# Altium PCB digital_power.PcbDoc (part 1 of 2)
Units mil, origin at the board's own origin, x right, y up, seen from the top; angles counter-clockwise.
Board outline 2700 x 2100 mil, 4 copper layers (L1, L2, L3, L4), stack 13.956 mil thick; 99 components, 71 nets, 287 pads, 79 vias.
Unrouted connection lines stored in the file: 196.
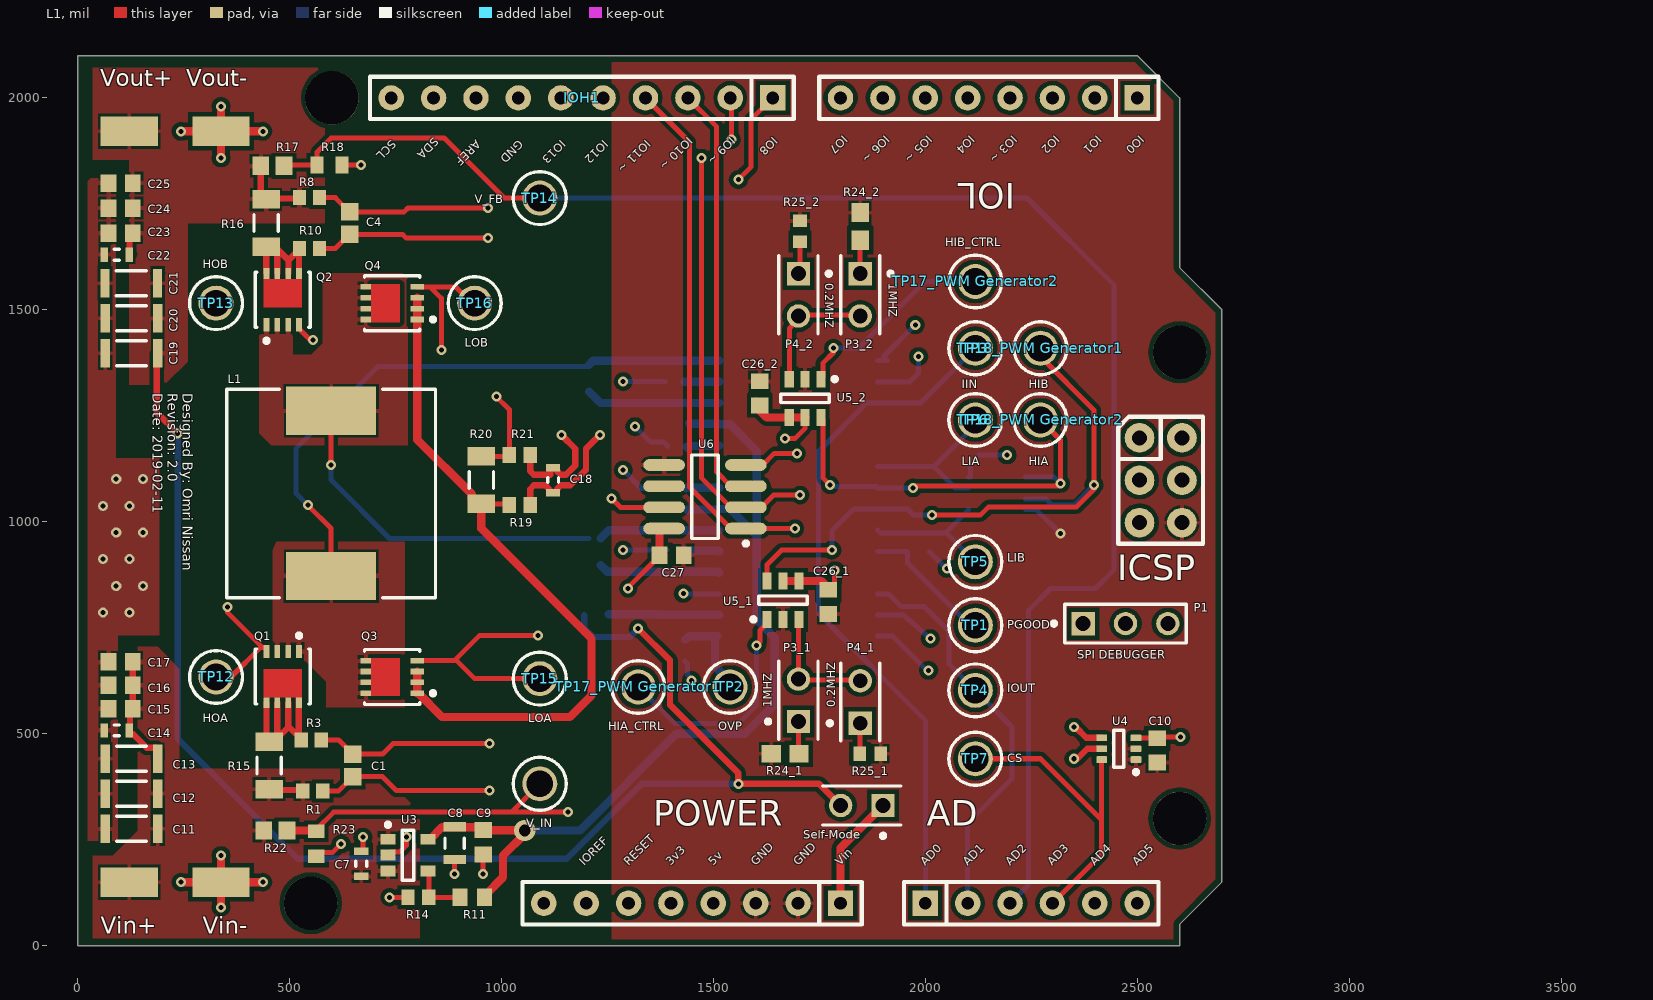
[diagram p0: L1 view]
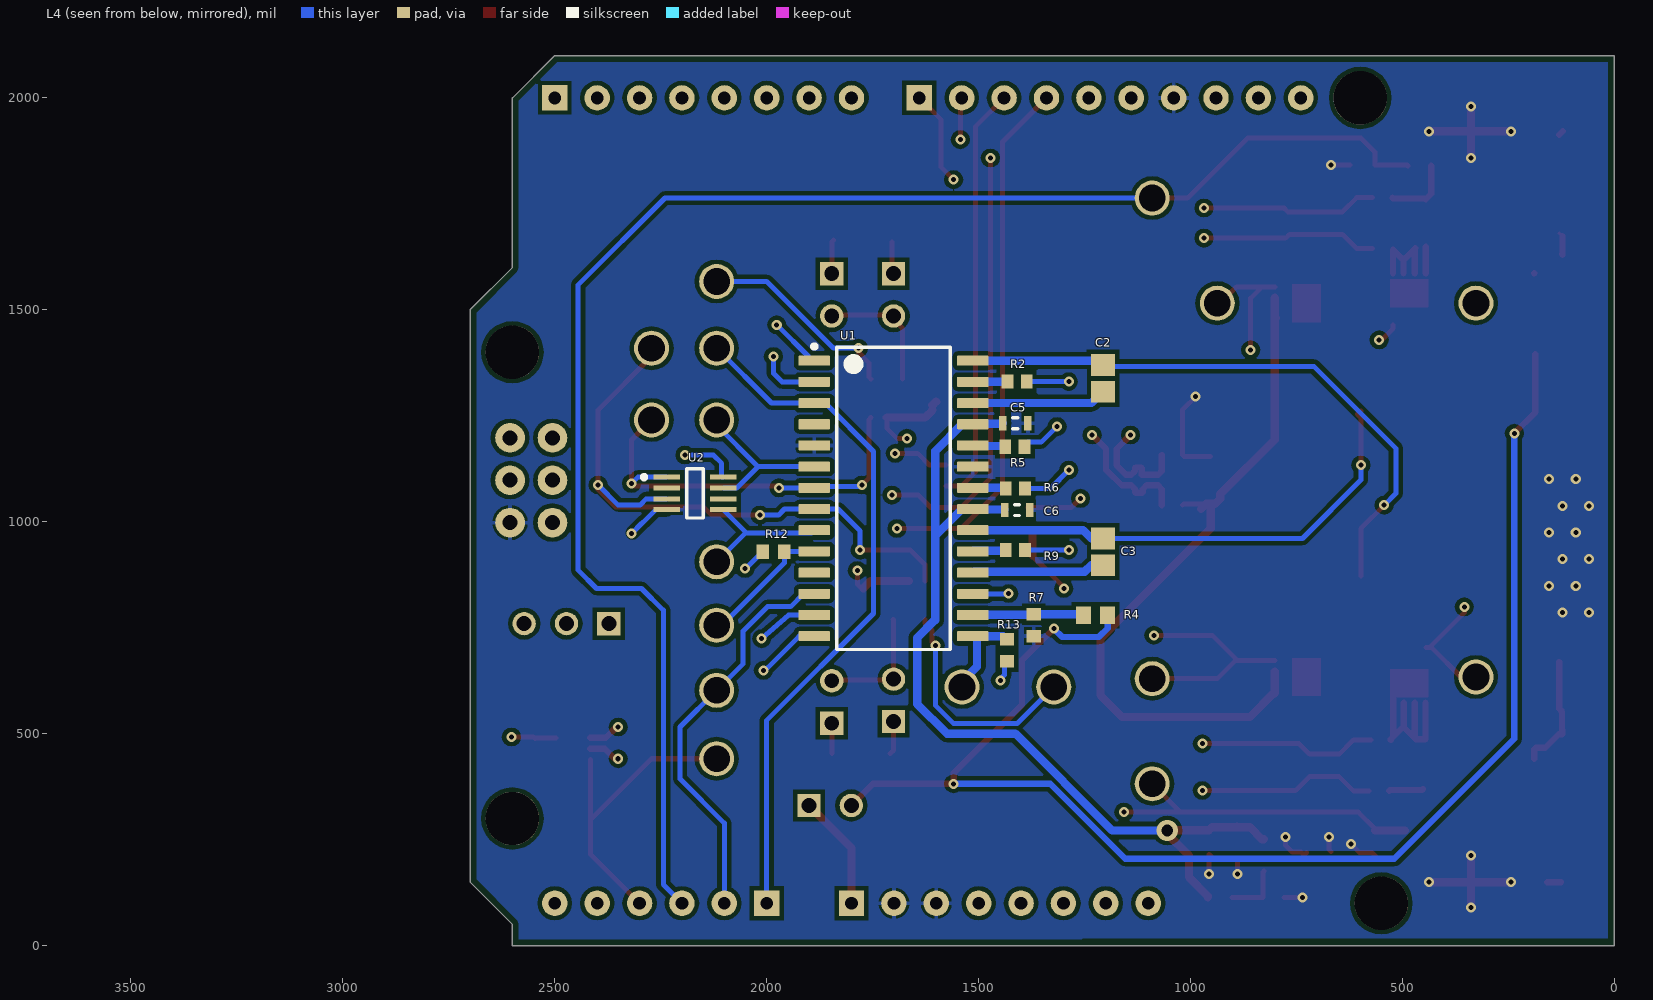
[diagram p1: L4 view, seen from below]
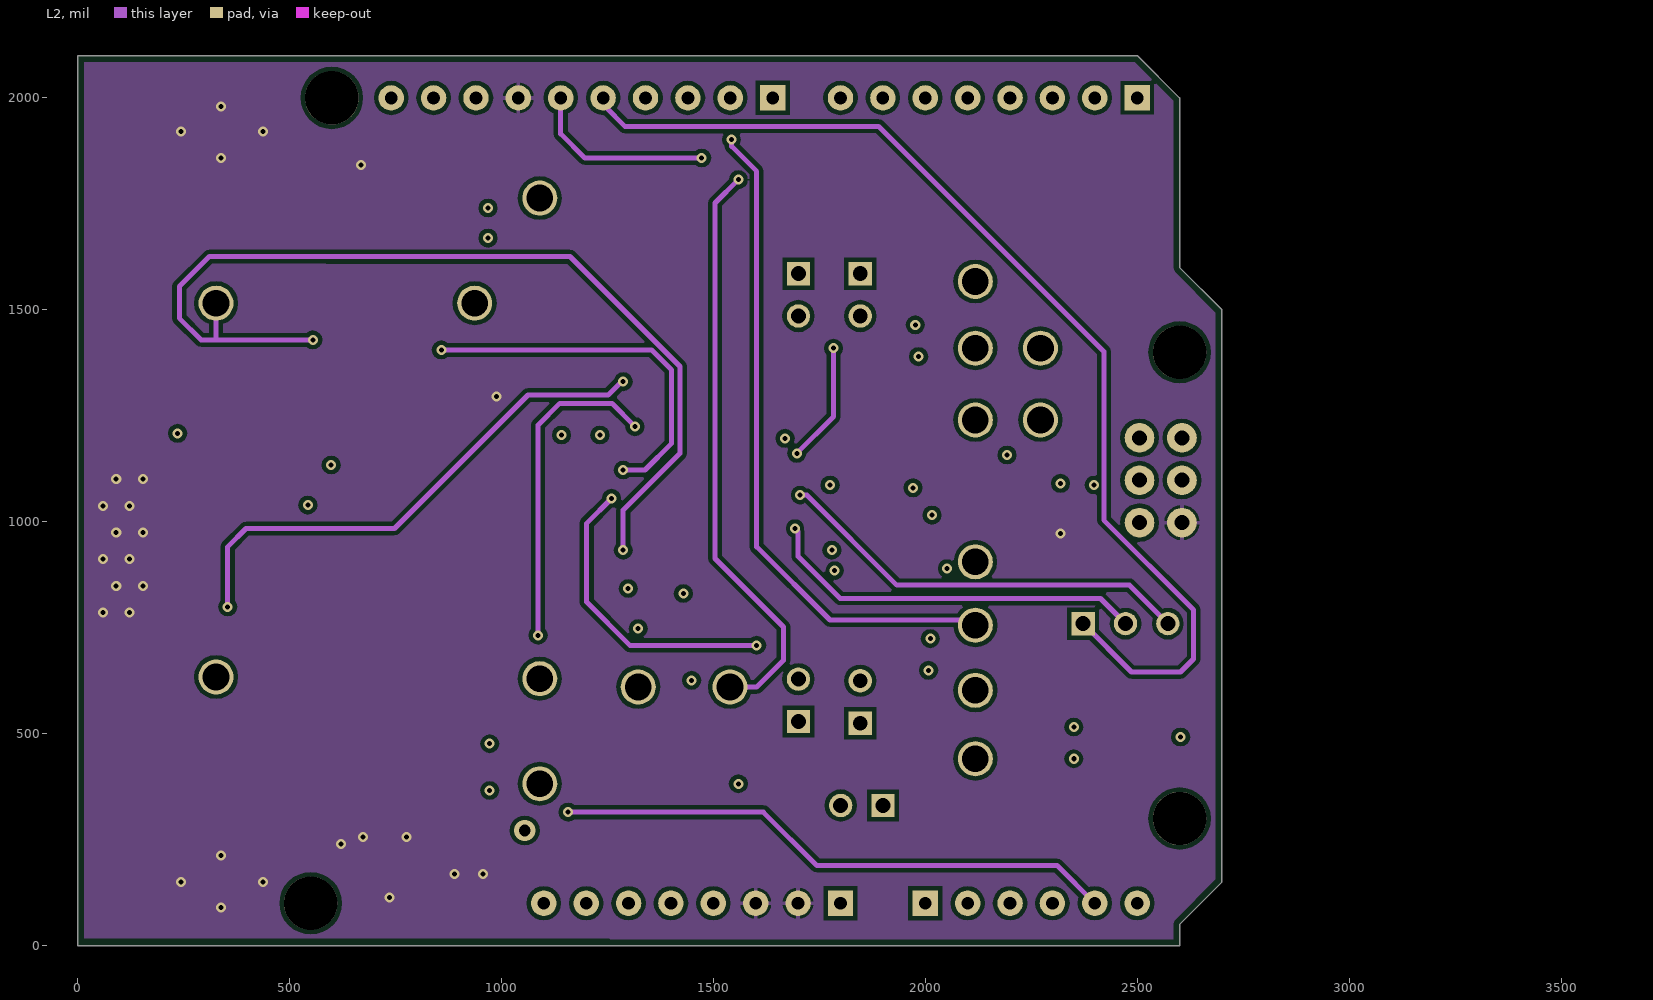
[diagram p2: L2]
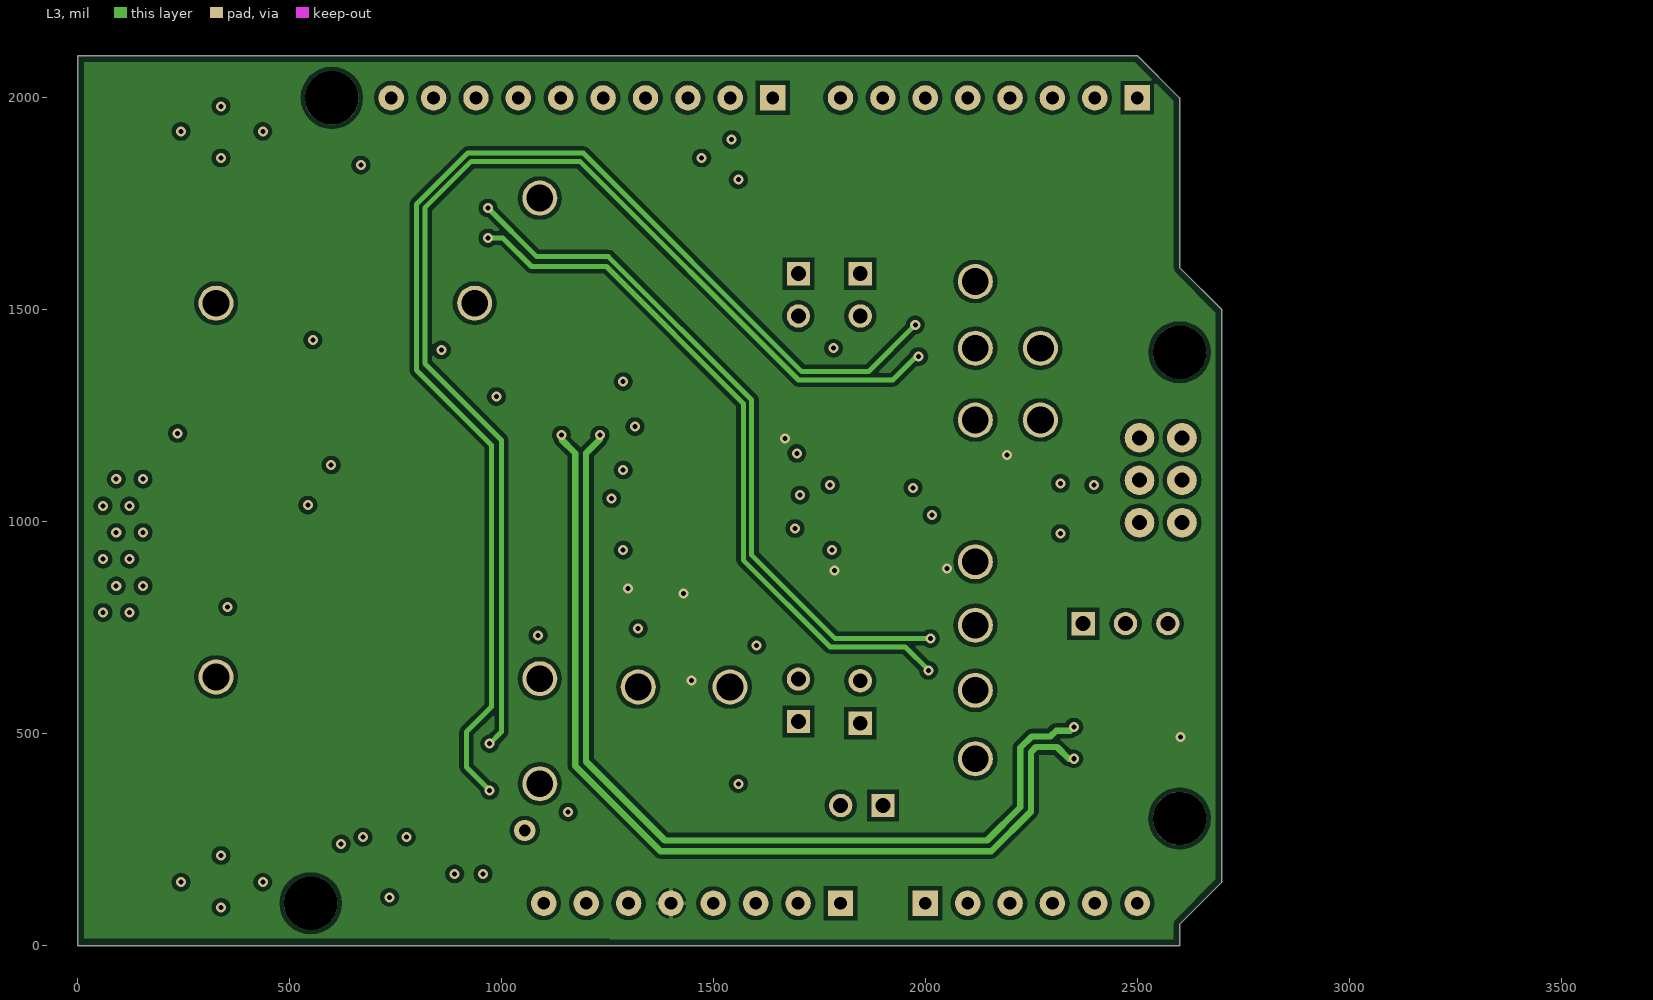
[diagram p3: L3]
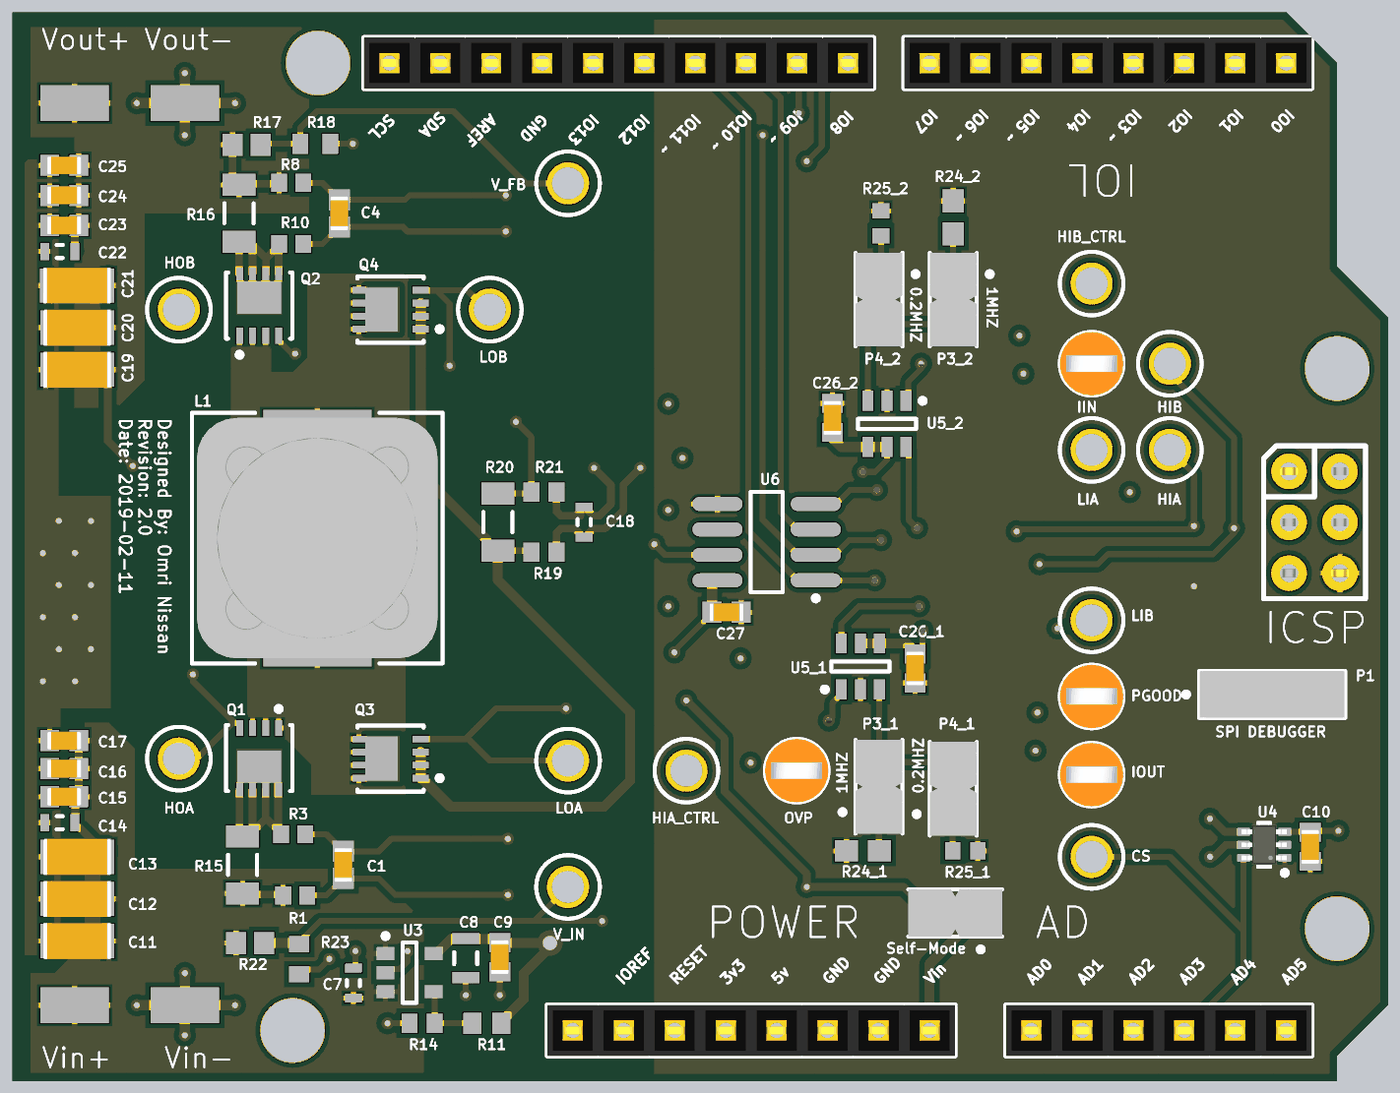
[diagram p4: 3D render of the assembled board from above, using the file's embedded part models]

## Layer stack, top to bottom
Top Solder: solder mask 0.4, Solder Resist, Dk 3.5
L1: signal copper 1.4
Dielectric 1: prepreg 2.8, FR-4, Dk 4.1
L2: signal copper 1.3778
Dielectric1: prepreg 2.8, PP-006, Dk 4.1
L3: signal copper 1.3778
Dielectric 2: prepreg 2.8, FR-4, Dk 4.1
L4: signal copper 1.4
Bottom Solder: solder mask 0.4, Solder Resist, Dk 3.5

## Board outline
0,0 0,2100 2500,2100 2600,2000 2600,1600 2700,1500 2700,150 2600,50 2600,0

## Design rules (kind name [scope] priority, off if disabled: settings)
BoardOutlineClearance [All] p1: gap=15 ignorepadtopadclearanceinfootprint=FALSE
Clearance "Clearance Polygons" [InPolygon] p1: gap=10 ignorepadtopadclearanceinfootprint=FALSE except(0: Arc-Hole Track-Hole SMDPad-Hole THPad-Hole Via-Hole Fill-Hole Poly-Hole Region-Hole Text-Hole)
Clearance [All] p2: gap=5 ignorepadtopadclearanceinfootprint=FALSE except(0: Arc-Hole Track-Hole SMDPad-Hole THPad-Hole Via-Hole Fill-Hole Poly-Hole Region-Hole Text-Hole)
ComponentClearance "HM-TRP & UFL" [InComponent('X1') vs InComponent('U1')] p1: gap=0 collisioncheckmode=3 verticalgap=0 showdistances=FALSE
ComponentClearance [All] p2: gap=1 collisioncheckmode=3 verticalgap=1 showdistances=FALSE
DiffPairsRouting [All] p1: maxlimit=393.7 minlimit=5 mostfreqgap=8 toplayer_minwidth=5 toplayer_maxwidth=15 toplayer_prefwidth=8 midlayer1_minwidth=5 midlayer1_maxwidth=15 midlayer1_prefwidth=8 midlayer2_minwidth=5 midlayer2_maxwidth=15 midlayer2_prefwidth=8 bottomlayer_minwidth=5 bottomlayer_maxwidth=15 bottomlayer_prefwidth=8 maxuncoupledlength=500
HoleSize [All] p1: absolutevalues=TRUE maxlimit=265 minlimit=10 maxpercent=80.000 minpercent=20.000
HoleToHoleClearance [All] p1: gap=10 allowstackedmicrovias=FALSE
MinimumAnnularRing [All] p1: minimumring=4
MinimumSolderMaskSliver [All] p1: minsoldermaskwidth=0
PlaneClearance [All] p1: clearance=10
PlaneConnect [All] p1: planeconnectstyle=Relief reliefexpansion=4 reliefentries=4 reliefconductorwidth=6 reliefairgap=6
PolygonConnect "Via connect style" [isVia] p1: connectstyle=Direct reliefconductorwidth=10 reliefentries=4 polygonreliefangle="90 Angle" airgapwidth=10
PolygonConnect [All] p2: connectstyle=Relief reliefconductorwidth=10 reliefentries=4 polygonreliefangle="90 Angle" airgapwidth=6
RoutingCorners [All] p1: cornerstyle=45-Degree minsetback=49.21 maxsetback=49.21
RoutingVias [All] p1: holewidth=12 width=22 viastyle="Through Hole" minholewidth=10 minwidth=18 maxholewidth=100 maxwidth=114
SilkToSilkClearance [All] p1: silktosilkclearance=0
SilkToSolderMaskClearance [IsPad] p1: minsilkscreentomaskgap=5 clearancetoexposedcopper=TRUE
SolderMaskExpansion [All] p1: expansion=2.5
Width GND [InNet('GND')] p1: maxlimit=30 minlimit=10 preferedwidth=20
Width Power [InNetClass('Power')] p2: maxlimit=40 minlimit=20 preferedwidth=30
Width 3V3 [InNetClass('3V3')] p3: maxlimit=30 minlimit=10 preferedwidth=20
Width [All] p4: maxlimit=400 minlimit=6 preferedwidth=8
20 further rules are at their usual default settings.

## Classes and differential pairs
channel class pwm_generator: "PWM Generator1" "PWM Generator2"
differential pair SB: +SB_P -SB_N
differential pair SA: +SA_P -SA_N
differential pair CS: +CS_P -CS_N

## Components (designator, comment, footprint, x,y, rotation, side; value= is the part's Value field where it differs from the comment)
AD "AD" "Header 6x1 8.5mm" 2000,100 r0 top locked (schematic designator AD1)
C1 "10nF" CAPC1608X90X40ML10T20 649.61,425.2 r270 top
C2 "0.47uF" CAPC2013X110X50NL20T25 1206.69,1338.58 r90 bottom
C3 "0.47uF" CAPC2013X110X50NL20T25 1206.69,929.13 r90 bottom
C4 "10nF" CAPC1608X90X40ML10T20 641.73,1704.72 r90 top
C5 "1uF" CAPC1608X90X20LL10 1413.39,1232.28 r180 bottom
C6 "1uF" CAPC1608X90X20LL10 1409.45,1027.56 r180 bottom
C7 "1uF" CAPC1608X90X20LL10 669.29,192.91 r90 top
C8 "2.2uF" CAPC2013X145X20LL20 889.76,242 r90 top
C9 "0.1uF" CAPC1608X90X35ML10T15 956.69,243.97 r90 top
C10 "0.1uF" CAPC1608X90X35ML10T15 2547.24,460.63 r270 top
C11 "10uF" CAPC3216X180X20LL20 127.36,275.59 r0 top
C12 "10uF" CAPC3216X180X20LL20 127.36,358.27 r0 top
C13 "10uF" CAPC3216X180X20LL20 127.36,440.94 r0 top
C14 "1uF" CAPC1608X90X20LL10 92.91,507.87 r180 top
C15 "0.1uF" CAPC1608X90X35ML10T15 101.77,559.06 r0 top
C16 "0.1uF" CAPC1608X90X35ML10T15 101.77,614.17 r0 top
C17 "0.1uF" CAPC1608X90X35ML10T15 101.77,669.29 r0 top
C18 "1uF" CAPC1608X90X20LL10 1122.05,1098.43 r90 top
C19 "10uF" CAPC3216X180X20LL20 127.36,1397.64 r0 top
C20 "10uF" CAPC3216X180X20LL20 127.36,1480.32 r0 top
C21 "10uF" CAPC3216X180X20LL20 126.97,1562.99 r0 top
C22 "1uF" CAPC1608X90X20LL10 92.91,1629.92 r180 top
C23 "0.1uF" CAPC1608X90X35ML10T15 101.77,1681.1 r0 top
C24 "0.1uF" CAPC1608X90X35ML10T15 101.77,1740.16 r0 top
C25 "0.1uF" CAPC1608X90X35ML10T15 101.77,1799.21 r0 top
C26_1 "0.1uF" CAPC1608X90X35ML10T15 1771.65,811.02 r90 top (schematic designator C26)
C26_2 "0.1uF" CAPC1608X90X35ML10T15 1609.31,1303.15 r270 top (schematic designator C26)
C27 "0.1uF" CAPC1608X90X35ML10T15 1401.57,921.26 r0 top
ICSP "ICSP" ICSP 2505.51,1198.03 r0 top locked (schematic designator ICSP1)
IOH1 "IOH" "Header 10x1 8.5mm" 1640,2000 r180 top locked
IOL "IOL" "Header 8x1 8.5mm" 2500,2000 r180 top locked (schematic designator IOL1)
L1 "100uH" WE-PD-XXL 598.43,1066.93 r90 top
P1 "87224-3" TECO-87224-3_V 2472.44,759.84 r0 top
P3_1 "5-146280-2" TECO-5-146280-2_V 1700.79,578.74 r90 top (schematic designator P3)
P3_2 "5-146280-2" TECO-5-146280-2_V 1846.46,1535.43 r270 top (schematic designator P3)
P4_1 "5-146280-2" TECO-5-146280-2_V 1846.46,574.8 r90 top (schematic designator P4)
P4_2 "5-146280-2" TECO-5-146280-2_V 1700.79,1535.43 r270 top (schematic designator P4)
POWER "POWER_UNO" "Header 8x1 8.5mm" 1800,100 r180 top locked (schematic designator POWER1)
Q1 "BSZ160N10NS3 G" INF-PG-TSDSON-8-1_V 484.25,634.91 r90 top
Q2 "BSZ160N10NS3 G" INF-PG-TSDSON-8-1_V 484.25,1523.62 r270 top
Q3 "BSZ160N10NS3 G" INF-PG-TSDSON-8-1_V 742.13,633.86 r0 top
Q4 "BSZ160N10NS3 G" INF-PG-TSDSON-8-1_V 742.13,1515.75 r0 top
R1 "499Ω" RESC1608X55X30LL20T20 555.12,365.16 r0 top
R2 "3.3Ω" RESC1609X50X30LL10T20 1409.45,1330.71 r180 bottom
R3 "499Ω" RESC1608X55X30LL20T20 551.18,485.24 r0 top
R4 "49.9kΩ" RESC1608X55X30ML15T15 1224.41,779.53 r180 bottom
R5 "3.3Ω" RESC1609X50X30LL10T20 1414.37,1177.17 r180 bottom
R6 "3.3Ω" RESC1609X50X30LL10T20 1413.39,1078.74 r180 bottom
R7 "10kΩ" RESC1609X55X30LL15T15 1370.08,755.91 r90 bottom
R8 "499Ω" RESC1608X55X30LL20T20 547.24,1764.76 r0 top
R9 "3.3Ω" RESC1609X50X30LL10T20 1413.39,933.07 r180 bottom
R10 "499Ω" RESC1608X55X30LL20T20 547.24,1644.68 r0 top
R11 "169kΩ" RESC1608X55X30ML15T15 931.1,114.17 r0 top
R12 "10kΩ" RESC1609X55X30LL15T15 1984.25,929.13 r0 bottom
R13 "10kΩ" RESC1609X55X30LL15T15 1433.07,696.85 r270 bottom
R14 "24kΩ" RESC1609X50X30NL10T20 804.13,114.17 r180 top
R15 "10mΩ" RESC3216X70X50NL05T20 451.83,425.2 r90 top
R16 "10mΩ" RESC3216X70X50NL05T20 444.88,1704.72 r90 top
R17 "100kΩ" RESC1608X55X30ML20T20 459.65,1839.57 r180 top
R18 "3kΩ" RESC1608X55X25ML10T15 594.49,1841.54 r180 top
R19 "10Ω" RESC1609X50X30NL10T20 1043.31,1039.37 r180 top
R20 "10mΩ" RESC3216X70X50NL05T20 952.76,1098.43 r270 top
R21 "10Ω" RESC1609X50X30NL10T20 1043.31,1157.48 r180 top
R22 "100kΩ" RESC1608X55X30ML20T20 466.6,271.65 r180 top
R23 "3kΩ" RESC1608X55X25ML10T15 562.99,240.16 r90 top
R24_1 "49.9kΩ" RESC1609X55X30ML10T20 1669.29,452.76 r0 top (schematic designator R24)
R24_2 "49.9kΩ" RESC1609X55X30ML10T20 1846.46,1696.85 r270 top (schematic designator R24)
R25_1 "249kΩ" RESC1609X55X30LL10T20 1870.08,452.76 r180 top (schematic designator R25)
R25_2 "249kΩ" RESC1609X55X30LL10T20 1704.72,1685.04 r270 top (schematic designator R25)
Self-Mode "5-146280-2" TECO-5-146280-2_V 1850.39,330.71 r180 top (schematic designator P5)
TP1 "PGOOD" KSTN-5013_V 2118.11,755.91 r0 top
TP2 "OVP" KSTN-5013_V 1539.37,610.24 r0 top
TP3 "IIN" KSTN-5013_V 2118.11,1409.45 r0 top
TP4 "IOUT" KSTN-5013_V 2118.11,602.36 r0 top
TP5 "LIB" KSTN-5012_V 2118.11,905.51 r0 top
TP6 "LIA" KSTN-5012_V 2118.11,1240.16 r0 top
TP7 "CS" KSTN-5012_V 2118.11,440.94 r0 top
TP12 "HOA" KSTN-5012_V 326.77,633.86 r0 top
TP13 "HOB" KSTN-5012_V 326.77,1515.75 r0 top
TP14 "V_FB" KSTN-5012_V 1090.55,1763.78 r0 top
TP15 "LOA" KSTN-5012_V 1090.55,629.92 r0 top
TP16 "LOB" KSTN-5012_V 937.01,1515.75 r0 top
"TP17_PWM Generator1" "HIA_CTRL" KSTN-5012_V 1322.83,610.24 r0 top (schematic designator TP17)
"TP17_PWM Generator2" "HIB_CTRL" KSTN-5012_V 2118.11,1566.93 r90 top (schematic designator TP17)
"TP18_PWM Generator1" "HIB" KSTN-5012_V 2271.65,1409.45 r0 top (schematic designator TP18)
"TP18_PWM Generator2" "HIA" KSTN-5012_V 2271.65,1240.16 r0 top (schematic designator TP18)
U1 "SM72295MA/NOPB" DW0028A_N 1700.79,1055.12 r180 bottom
U2 "SN74LVC3G04DCTR" TI-DCT8_V 2169.29,1066.93 r180 bottom
U3 "MIC5233YM5-TR" MF05A_L 779.53,213.52 r0 top
U4 "INA214AIDCKT" DCK0006A_L 2456.69,464.57 r180 top
U5_1 "LTC6992-1" LT-S6-6-TSOT-23_L 1664.37,814.96 r90 top (schematic designator U5)
U5_2 "LTC6992-1" LT-S6-6-TSOT-23_L 1716.54,1291.34 r270 top (schematic designator U5)
U6 "TLV5638MDREP" TI-D8_M 1480.31,1059.05 r180 top
V_IN "V_IN" KSTN-5012_V 1090.55,381.89 r0 top (schematic designator TP19)
Vin+ "5015" KSTN-5015_V 122.05,149.61 r180 top (schematic designator TP8)
Vin- "5015" KSTN-5015_V 338.58,149.61 r180 top (schematic designator TP10)
Vout+ "5015" KSTN-5015_V 122.05,1921.26 r180 top (schematic designator TP9)
Vout- "5015" KSTN-5015_V 338.58,1921.26 r180 top (schematic designator TP11)

## Footprints (in the part's own frame and the unit in brackets; to place one, negate y for a bottom-side part, rotate by r counter-clockwise, add the part's x,y. Pads: shape width x height; smd on the part's side, far side on the other; paste and mask are expansions set on the pad)
CAPC1608X90X20LL10 [mm] "Chip Capacitor, 2-Leads, Body 1.70x0.90mm, IPC High Density"
  rect 0.45x0.85 smd: 1(-0.75,0) 2(0.75,0)
  silkscreen extent -0.15,-0.33 0.15,0.33, body extent -0.85,-0.45 0.85,0.45, height 0.9
CAPC1608X90X35ML10T15 [mm] "Chip Capacitor, 2-Leads, Body 1.7x0.9mm, IPC Low Density"
  rect 0.95x1.05 smd: 1(-0.725,0) 2(0.725,0)
  body extent -0.85,-0.45 0.85,0.45, height 0.9
CAPC1608X90X40ML10T20 [mm] "Chip Capacitor, 2-Leads, Body 1.7x0.9mm, IPC Low Density"
  rect 1.05x1.05 smd mask+0.02: 1(-0.675,0) 2(0.675,0)
  body extent -0.85,-0.45 0.85,0.45, height 0.9
CAPC2013X110X50NL20T25 [mm] "Chip Capacitor, 2-Leads, Body 2.00x1.25mm, IPC Medium Density"
  rect 1.3x1.45 smd mask+0.02: 1(-0.8,0) 2(0.8,0)
  body extent -1.1,-0.72 1.1,0.72, height 1.1
CAPC2013X145X20LL20 [mm] "Chip Capacitor, 2-Leads, Body 2.20x1.45mm, IPC High Density"
  rect 0.55x1.35 smd: 1(-0.975,0) 2(0.975,0)
  silkscreen extent -0.3,-0.58 0.3,0.58, body extent -1.1,-0.72 1.1,0.72, height 1.45
CAPC3216X180X20LL20 [mm] "Chip Capacitor, 2-Leads, Body 3.40x1.80mm, IPC High Density"
  rect 0.55x1.7 smd: 1(-1.575,0) 2(1.575,0)
  silkscreen extent -0.9,-0.75 0.9,0.75, body extent -1.7,-0.9 1.7,0.9, height 1.8
DCK0006A_L [mm] "SOT23, 6-Leads, Body 2.15x1.4mm, Pitch 0.65mm, IPC High Density"
  rrect25% 0.65x0.4 smd mask+0.02: 1(-1.025,0.65) 2(-1.025,0) 3(-1.025,-0.65) 4(1.025,-0.65) 5(1.025,0) 6(1.025,0.65)
  silkscreen extent -1.15,-1.1 0.3,1.52, body extent -1.14,-1 1.14,1, height 0.94
DW0028A_N [mm] "SOIC, 28-Leads, Body 18.1x7.6mm, Pitch 1.27mm, IPC Medium Density"
  rrect17% 1.9x0.6 smd: 1(-4.75,8.255) 2(-4.75,6.985) 3(-4.75,5.715) 4(-4.75,4.445) 5(-4.75,3.175) 6(-4.75,1.905) 7(-4.75,0.635) 8(-4.75,-0.635) 9(-4.75,-1.905) 10(-4.75,-3.175) 11(-4.75,-4.445) 12(-4.75,-5.715) 13(-4.75,-6.985) 14(-4.75,-8.255) 15(4.75,-8.255) 16(4.75,-6.985) 17(4.75,-5.715) 18(4.75,-4.445) 19(4.75,-3.175) 20(4.75,-1.905) 21(4.75,-0.635) 22(4.75,0.635) 23(4.75,1.905) 24(4.75,3.175) 25(4.75,4.445) 26(4.75,5.715) 27(4.75,6.985) 28(4.75,8.255)
  silkscreen extent -4.88,-9.05 3.4,9.23, body extent -5.16,-8.95 5.16,8.95, height 2.55
"Header 6x1 8.5mm" [mil] "Stackable 6 pin header"
  rect 60x60 hole 30: 1(0,0)
  round 60 hole 30: 2(100,0) 3(200,0) 4(300,0) 5(400,0) 6(500,0)
  silkscreen extent -50,-50 550,50, body extent -50,-50 550,50, height 335
"Header 8x1 8.5mm" [mil] "Stackable 8 pin header"
  rect 60x60 hole 30: 1(0,0)
  round 60 hole 30: 2(100,0) 3(200,0) 4(300,0) 5(400,0) 6(500,0) 7(600,0) 8(700,0)
  silkscreen extent -50,-50 750,50, body extent -50,-50 750,50, height 335
"Header 10x1 8.5mm" [mil] "Stackable 10 pin header"
  rect 60x60 hole 30: 1(0,0)
  round 60 hole 30: 2(100,0) 3(200,0) 4(300,0) 5(400,0) 6(500,0) 7(600,0) 8(700,0) 9(800,0) 10(900,0)
  silkscreen extent -50,-50 950,50, body extent -50,-50 950,50, height 335
ICSP [mil]
  round 70 hole 35.43: 1(0,0) 2(100,0) 3(0,-100) 4(100,-100) 5(0,-200) 6(100,-200)
  silkscreen extent -50,-250 150,50, body extent -50,-250 150,50, height 485
INF-PG-TSDSON-8-1_V [mm] "TSDSON, 8-Leads, Body 3.3x3.3mm, Pitch 0.65mm"
  rect 0.8x0.34 smd: 1(1.5,-0.975) 2(1.5,-0.325) 3(1.5,0.325) 4(1.5,0.975)
  rect 0.65x0.34 smd: 5(-1.575,0.975) 6(-1.575,0.325) 7(-1.575,-0.325) 8(-1.575,-0.975)
  L1 region: -1.25,-1.145 0.46,-1.145 0.46,1.145 -1.25,1.145
  silkscreen extent -1.65,-1.65 2.57,1.65, body extent -1.65,-1.65 1.65,1.65, height 1.1
KSTN-5012_V [mm] "Test Point, Dia 3.17mm"
  round 2.1 hole 1.6: 1(0,0)
  silkscreen extent -1.59,-1.58 1.59,1.58, body extent -1.59,-1.59 1.59,1.59, height 8.13
KSTN-5013_V [mm] "Test Point, Dia 3.17mm"
  round 2.1 hole 1.6: 1(0,0)
  silkscreen extent -1.59,-1.58 1.59,1.58, body extent -1.59,-1.59 1.59,1.59, height 8.13
KSTN-5015_V [mm] "SMD, Body 2.63x1.02mm"
  rect 3.43x1.78 smd: 1(0,0)
  body extent -1.53,-0.51 1.53,0.49, height 1.49
LT-S6-6-TSOT-23_L [mm] "SOT23, 6-Leads, Body 2.90x1.63mm, Pitch 0.95mm, IPC High Density"
  rect 1x0.55 smd: 1(-1.15,0.95) 2(-1.15,0) 3(-1.15,-0.95) 4(1.15,-0.95) 5(1.15,0) 6(1.15,0.95)
  silkscreen extent -1.27,-1.45 0.25,1.9, body extent -0.87,-1.45 0.87,1.45, height 1
MF05A_L [mm] "SOT23, 5-Leads, Body 2.9x1.6mm, Pitch 0.95mm, Lead Span 2.8mm, IPC High Density"
  rect 0.9x0.65 smd mask+0.02: 1(-1.2,0.95) 2(-1.2,0) 3(-1.2,-0.95) 4(1.2,-0.95) 5(1.2,0.95)
  silkscreen extent -1.32,-1.5 0.35,1.95, body extent -0.83,-1.49 0.83,1.5, height 1.19
RESC1608X55X25ML10T15 [mm] "Chip Resistor, 2-Leads, Body 1.60x0.80mm, IPC Low Density"
  rect 0.8x1 smd: 1(-0.75,0) 2(0.75,0)
  body extent -0.85,-0.45 0.85,0.45, height 0.55
RESC1608X55X30LL20T20 [mm] "Chip Resistor, 2-Leads, Body 1.60x0.80mm, IPC High Density"
  rect 0.8x0.9 smd: 1(-0.6,0) 2(0.6,0)
  body extent -0.9,-0.5 0.9,0.5, height 0.55
RESC1608X55X30ML15T15 [mm] "Chip Resistor, 2-Leads, Body 1.60x0.80mm, IPC Low Density"
  rect 0.9x1.05 smd: 1(-0.725,0) 2(0.725,0)
  body extent -0.87,-0.48 0.87,0.48, height 0.55
RESC1608X55X30ML20T20 [mm] "Chip Resistor, 2-Leads, Body 1.60x0.80mm, IPC Low Density"
  rect 1x1.1 smd: 1(-0.7,0) 2(0.7,0)
  body extent -0.9,-0.5 0.9,0.5, height 0.55
RESC1609X50X30LL10T20 [mm] "Chip Resistor, 2-Leads, Body 1.55x0.85mm, IPC High Density"
  rect 0.7x0.85 smd: 1(-0.575,0) 2(0.575,0)
  body extent -0.82,-0.48 0.82,0.48, height 0.5
RESC1609X50X30NL10T20 [mm] "Chip Resistor, 2-Leads, Body 1.55x0.85mm, IPC Medium Density"
  rect 0.8x0.95 smd: 1(-0.625,0) 2(0.625,0)
  body extent -0.82,-0.48 0.82,0.48, height 0.5
RESC1609X55X30LL10T20 [mm] "Chip Resistor, 2-Leads, Body 1.60x0.85mm, IPC High Density"
  rect 0.75x0.85 smd: 1(-0.625,0) 2(0.625,0)
  body extent -0.85,-0.48 0.85,0.48, height 0.55
RESC1609X55X30LL15T15 [mm] "Chip Resistor, 2-Leads, Body 1.75x0.95mm, IPC High Density"
  rect 0.75x0.85 smd: 1(-0.65,0) 2(0.65,0)
  body extent -0.87,-0.48 0.88,0.48, height 0.55
RESC1609X55X30ML10T20 [mm] "Chip Resistor, 2-Leads, Body 1.60x0.85mm, IPC Low Density"
  rect 1.15x1.05 smd: 1(-0.825,0) 2(0.825,0)
  body extent -0.85,-0.48 0.85,0.48, height 0.55
RESC3216X70X50NL05T20 [mm] "Chip Resistor, 2-Leads, Body 3.20x1.60mm, IPC Medium Density"
  rect 1.1x1.65 smd: 1(-1.425,0) 2(1.425,0)
  silkscreen extent -0.5,-0.72 0.5,0.72, body extent -1.63,-0.82 1.62,0.82, height 0.7
TECO-5-146280-2_V [mm] "Connector, 2-Leads, Body 4.67x2.34mm, Pitch 2.54mm"
  rect 1.4x1.4 hole 0.89: 1(-1.27,0)
  round 1.4 hole 0.89: 2(1.27,0)
  silkscreen extent -2.33,-1.17 2.33,1.94, body extent -2.34,-1.17 2.34,1.17, height 5.33
TECO-87224-3_V [mm] "THD, 3-Leads, Body 7.21x2.31mm, Pitch 2.54mm"
  rect 1.4x1.4 hole 0.889: 1(-2.54,0)
  round 1.4 hole 0.889: 2(0,0) 3(2.54,0)
  silkscreen extent -4.41,-1.17 3.64,1.17, body extent -3.61,-1.17 3.61,1.17, height 10.36
TI-D8_M [mm] "SOIC, 8-Leads, Body 4.9x3.9mm, Pitch 1.27mm, IPC Low Density"
  oval 2.5x0.7 smd: 1(-2.45,1.905) 2(-2.45,0.635) 3(-2.45,-0.635) 4(-2.45,-1.905) 5(2.45,-1.905) 6(2.45,-0.635) 7(2.45,0.635) 8(2.45,1.905)
  silkscreen extent -2.58,-2.5 0.8,2.93, body extent -2,-2.5 2,2.5, height 1.75
TI-DCT8_V [mm] "SOP, 8-Leads, Body 2.95x2.8mm, Pitch 0.65mm"
  rect 1.6x0.3 smd paste-0.025 mask+0.07: 1(-1.7,0.975) 2(-1.7,0.325) 3(-1.7,-0.325) 4(-1.7,-0.975) 5(1.7,-0.975) 6(1.7,-0.325) 7(1.7,0.325) 8(1.7,0.975)
  silkscreen extent -3.17,-1.48 0.5,1.48, body extent -1.4,-1.48 1.4,1.48, height 1.3
WE-PD-XXL [mm] "SMD Inductor, 2-Leads, Body 12.0 x 12.0 mm"
  rect 2.9x5.4 smd: 1(-4.95,0) 2(4.95,0)
  silkscreen extent -6.25,-6.25 6.25,6.25, body extent -6,-6 6,6, height 10.36

## Part data
AD: Supplier Part Number 1=2699089, Supplier 1=Arrow, Supplier 2=Digi-Key, Supplier 3=Arrow, Supplier 4=Arrow, Supplier Part Number 2=SAM1198-06-ND, Supplier Part Number 3=2699088, Supplier Part Number 4=2699075
C1 C4: library part CMP-2100-03600-1, "CC0603KRX7R9BB103 - Chip Capacitor, 10 nF, +/- 10%, 50 V, -55 to 125 degC, 0603 (1608 Metric), RoHS, Tape and Reel", Case/Package=0603, Case Code (Metric)=1608, Dielectric=X7R, Insulation Resistance=100GR, Manufacturer=Yageo, Max Operating Temperature=125degC, Min Operating Temperature=-55degC, Package Description="2-Pin Surface Mount Device, Body 1.6 x 0.8 mm", Package Quantity=1, Tolerance=10%, Voltage=50V, Capacitance=10nF, Case Code (Imperial)=0603, Composition=Ceramic, Datasheet URL=http://www.yageo.com/documents/recent/UPY-GPHC_X7R_6.3V-to-50V_15.pdf, Datasheet Version="Rev. 15, 10/2016", Depth=0.8mm, Height=0.8mm, Lead Free=LeadFree, Length=1.6mm, Manufacturer URL=http://www.yageo.com/, Material=Ceramic, Mount=SurfaceMount, Number of Pins=2, Package Reference=0603, Packaging=TapeandReel, Radiation Hardening=No, REACH SVHC=NoSVHC, RoHSCompliant=True, Termination=SMD/SMT, Thickness=0.035inch, Voltage Rating=50V, Voltage Rating (DC)=50V, Width=0.031inch
C2 C3: library part CMP-2007-03659-1, "C0805C474K5RACTU", Manufacturer=Kemet, Part Number=C0805C474K5RACTU
C5 C6 C7 C14 C18 C22: library part CMP-2000-06025-1, "C1608X5R1H105K080AB- Chip Capacitor, 1 uF, +/- 10%, 50 V, -55 to 85 degC, 0603 (1608 Metric), RoHS, Tape and Reel", Capacitance=1µF, Manufacturer=TDK, Operating Temperature=-55°C~85°C, Package / Case=0603(1608Metric), Package Description="2-Pin Surface Mount Device, Body 1.6 x 0.8 mm", Package Reference=0603, PCN Part Number=MLCCPartNumberChange30/Nov/2012, Ratings=-, Standard Package=1, Temperature Coefficient=X5R, Tolerance=±10%, Voltage - Rated=50V, Applications=GeneralPurpose, Category=Capacitors, Datasheet URL=https://product.tdk.com/info/en/catalog/datasheets/mlcc_commercial_general_en.pdf, Datasheet Version=08/2016, Design Resources=20WNon-IsolatedBuckLEDDriverUsingPLLNK460KG, Family=CeramicCapacitors, Features=-, Height - Seated (Max)=-, Lead Spacing=-, Lead Style=-, Manufacturer URL=http://www.tdk.com/, Mounting Technology=SurfaceMount, Mounting Type=SurfaceMount,MLCC, Online Catalog=CSeries,GeneralPurpose, Other Names=445-7468-6, Packaging=Digi-Reel®, Product Training Modules=CSeriesGeneralApplicationsSEAT,CCV,andTVCLDesignToolsGuidetoReplacinganElectrolyticCapacitorwithanMLCC, RoHS Information=RoHSCertificate-MLCC, Series=C, Size / Dimension="0.063\"Lx0.031\"W(1.60mmx0.80mm)", Thickness (Max)="0.035\"(0.90mm)"
C8: library part CMP-2000-06040-1, "C2012X7R1H225K125AC -Chip Capacitor, 2.2 uF, +/- 10%, 50 V, -55 to 125 degC, 0805 (2012 Metric), RoHS, Tape and Reel", Capacitance=2.2µF, Manufacturer=TDK, Operating Temperature=-55°C~125°C, Package / Case=0805(2012Metric), Package Description="2-Pin Surface Mount Device, Body 2 x 1.25 mm", Package Reference=0805, PCN Part Number=MLCCPartNumberChange30/Nov/2012, Ratings=-, Standard Package=1, Temperature Coefficient=X7R, Tolerance=±10%, Voltage - Rated=50V, Applications=GeneralPurpose, Catalog Drawings=CSERIES_2012-0805_1.45, Category=Capacitors, Datasheet URL=https://datasheet.ciiva.com/24216/c2012x7r1h225k125ac-265016-24216364.pdf, Datasheet Version=09/2013, Family=CeramicCapacitors, Features=-, Height - Seated (Max)=-, Kits=445-9015-KIT-ND-KITMLCC1000PF-47UF080510-50V445-9003-KIT-ND-KITCAPCERHICAPMLCCSMD445-173086-KIT-ND-C0402-2220X7R6.3-50V1,000PF-, Lead Spacing=-, Lead Style=-, Manufacturer URL=http://www.tdk.com/, Mounting Technology=SurfaceMount, Mounting Type=SurfaceMount,MLCC, Online Catalog=CSeries,GeneralPurpose, Other Names=445-5968-1, Packaging=CutTape(CT), Product Training Modules=CSeriesGeneralApplicationsSEAT,CCV,andTVCLDesignToolsGuidetoReplacinganElectrolyticCapacitorwithanMLCC, RoHS Information=RoHSCertificate-MLCC, Series=C, Size / Dimension="0.079\"Lx0.049\"W(2.00mmx1.25mm)", Thickness (Max)="0.057\"(1.45mm)"
C9 C10 C15 C16 C17 C23 C24 C25 C26_1 C26_2 C27: library part CMP-2100-03643-1, "GRM188R71H104KA93D - Chip Capacitor, 0.1 uF, +/- 10%, 50 V, -55 to 125 degC, 0603 (1608 Metric), RoHS, Tape and Reel", Capacitance=100nF, Case/Package=0603, Case Code (Metric)=1608, Dielectric=X7R, Dielectric Material=Ceramic, Insulation Resistance=10GR, Manufacturer=Murata, Max Operating Temperature=125degC, Min Operating Temperature=-55degC, Package Description="2-Pin Surface Mount Device, Body 1.6 x 0.8 mm", Package Quantity=1, Tolerance=10%, Voltage=50V, Case Code (Imperial)=0603, Contact Plating=Tin, Datasheet URL=http://psearch.en.murata.com/capacitor/product/GRM188R71H104KA93%23.pdf, Datasheet Version=42675.0, Depth=0.8mm, Height=0.8mm, Lead Free=LeadFree, Length=1.6mm, Manufacturer URL=http://www.murata.com/, Material=Ceramic, Mount=SurfaceMount, Number of Pins=2, Package Reference=0603, Packaging=TapeandReel, Radiation Hardening=No, REACH SVHC=NoSVHC, RoHSCompliant=true, Termination=SMD/SMT, Thickness=0.035inch, Voltage Rating=50V, Voltage Rating (DC)=50V, Width=0.8mm
C11 C12 C13 C19 C20 C21: library part CMP-2000-06045-1, "C3216X5R1H106K160AB - Chip Capacitor, 10 uF, +/- 10%, 50 V, -55 to 85 degC, 1206 (3216 Metric), RoHS, Tape and Reel", Capacitance=10µF, Manufacturer=TDK, Operating Temperature=-55°C~85°C, Package / Case=1206(3216Metric), Package Description="2-Pin Surface Mount Device, Body 3.2 x 1.6 mm", Package Reference=1206, PCN Part Number=MLCCPartNumberChange30/Nov/2012, Ratings=-, Standard Package=1, Temperature Coefficient=X5R, Tolerance=±10%, Voltage - Rated=50V, Applications=GeneralPurpose, Catalog Drawings=CSERIES_1206_1.8, Category=Capacitors, Datasheet URL=https://product.tdk.com/info/en/catalog/datasheets/mlcc_commercial_general_en.pdf, Datasheet Version=08/2016, Family=CeramicCapacitors, Features=-, Height - Seated (Max)=-, Lead Spacing=-, Lead Style=-, Manufacturer URL=http://www.tdk.com/, Mounting Technology=SurfaceMount, Mounting Type=SurfaceMount,MLCC, Online Catalog=CSeries,GeneralPurpose, Other Names=445-5998-6, Package URL=https://product.tdk.com/info/en/documents/chara_sheet/C3216X7R1V106K160AC.pdf, Packaging=Digi-Reel®, Product Training Modules=CSeriesGeneralApplicationsSEAT,CCV,andTVCLDesignToolsGuidetoReplacinganElectrolyticCapacitorwithanMLCC, RoHS Information=RoHSCertificate-MLCC, Series=C, Size / Dimension="0.126\"Lx0.063\"W(3.20mmx1.60mm)", Thickness (Max)="0.071\"(1.80mm)"
ICSP: Supplier Part Number 1=2699117, Supplier 1=Arrow, Supplier 2=Arrow, Supplier 3=Digi-Key, Supplier 4=Arrow, Supplier 5=Digi-Key, Supplier Part Number 2=2699116, Supplier Part Number 3=SAM1185-06-ND, Supplier Part Number 4=2699091, Supplier Part Number 5=SAM1196-06-ND
IOH1: Supplier Part Number 1=2698803S4475693N1004, Supplier 1=Arrow, Supplier 2=Digi-Key, Supplier 3=Arrow, Supplier Part Number 2=SAM1198-10-ND, Supplier Part Number 3=2698789
IOL POWER: Supplier Part Number 1=SAM1198-08-ND, Supplier 1=Digi-Key, Supplier 2=Arrow, Supplier 3=Arrow, Supplier 4=Arrow, Supplier Part Number 2=2698939, Supplier Part Number 3=2698940, Supplier Part Number 4=2698925
L1: library part CMP-0227-00035-1, "7447709101 - SMD-Shielded Power Inductor WE-PD, L = 100 µH", Inductance="100 µH", ComponentLink1Description="Manufacturer Link", ComponentLink1URL=http://www.we-online.com, ComponentLink2Description=Datasheet, ComponentLink2URL=http://www.we-online.de/katalog/media/pdf/7447709101.pdf, DatasheetVersion="ver 1, Oct-2004", PackageDescription="SMD Inductor, 2-Leads, Body 12.0 x 12.0 mm", PackageReference=WE-PD-XXL, PackageVersion=2004
P1: library part CMP-2000-05697-1, "Male Header, Pitch 2.54 mm, 1 x 3 Position, Height 10.744 mm, Tail Length 3.175 mm, -65 to 105 degC, RoHS, Bulk", Color=Black, Manufacturer="TE Connectivity", Package Description="Male Header, Pitch 2.54 mm, 1 x 3 Position, Height 10.744 mm, Tail Length 3.175 mm", Standard Package=520, 3D Model=87224-3.pdf, Catalog Drawings="SingleSquareStraightPost /  / SingleSquareStraightPostSide", Category=Connectors,Interconnects, Connector Type=Header,Unshrouded, Contact Finish=Gold, Contact Finish Thickness=15µin(0.38µm), Contact Mating Length="0.318\"(8.08mm)", Contact Type=MalePin, Datasheet URL=http://www.te.com/commerce/DocumentDelivery/DDEController?Action=showdoc&DocId=Customer+Drawing%7F87224%7FL3%7Fpdf%7FEnglish%7FENG_CD_87224_L3.pdf%7F87224-3, Datasheet Version="Rev. L3, 08/2015", Dynamic Catalog=AMPMODUModIISeries, Family=RectangularConnectors-Headers,MalePins, Featured Product=AMPMODUConnectors, Manufacturer URL=http://www.te.com/, Mating Products="147738-2-ND / -CONNRCPT3POSVERTSMDGOLD / 147723-2-ND / -CONNRCPT3POSVERT.100GOLD / 146763-5-ND / -CONNRCPT3POSSGLVERT.100T/H / A32904-ND / -CONNRECEPT3POS.100VERTGOLD / A26922-ND / -CONNHOUSING3POS.100LOCKING / A26415-ND / -CONNRECEPT3POS.100VERTAU / A26964-ND / -CONNHOUSING3POS.100SINGLE / A3012-ND / -CONNHOUSING3POS.100SINGLE", Mounting Technology=ThroughHole, Mounting Type=ThroughHole, Number of Positions=3, Number of Positions Loaded=All, Number of Rows=1, Other Names="87224-3-ND / A26545", Package Reference=87224-3, Packaging=Bulk, Pitch="0.100\"(2.54mm)", RoHS Information=87224-3StatementofCompliance, Series=AMPMODUModII, Termination=Solder
P3_1 P3_2 P4_1 P4_2 Self-Mode: library part CMP-2000-07492-1, "Male Header, Pitch 2.54 mm, 1 x 2 Position, Height 8.21 mm, Tail Length 3.05 mm, -65 to 105 degC, RoHS, Bulk", Case\/Package=100, Colour=Black, Current Rating=3A, Flammability Rating=UL94V-0, High Temperature Housing=Yes, Manufacturer="TE Connectivity", Max Current Rating=5A, Max Operating Temperature=105degC, Min Operating Temperature=-65degC, Package Description="Male Header, Pitch 2.54 mm, 1 x 2 Position, Height 8.21 mm, Tail Length 3.05 mm", Package Quantity=500, Approvals=CSA, Board Standoff=No(Without), Connector Type=Header, Contact Gender=Male, Contact Material=CopperAlloy, Contact Mating Length=0.23inch, Contact Plating=Matte, Contact Protection=No(Without), Contact Shape=Square, Datasheet URL=http://www.te.com/commerce/DocumentDelivery/DDEController?Action=showdoc&DocId=Customer+Drawing%7F146280%7FH1%7Fpdf%7FEnglish%7FENG_CD_146280_H1.pdf%7F5-146280-2, Datasheet Version="Rev. H1, 08/2016", Depth=2.34mm, Gasket=No(Without), High Speed Serial Data Connector=No, Housing Colour=Black, Housing Material=Polymer, Keyed=No, Length=4.67mm, Manufacturer URL=http://www.te.com/, Mating Alignment=No(Without), Mating Connector Lock=No(Without), Mating Post Length=0.23inch, Mount=ThroughHole, Mounting Technology=ThroughHole, Number of Contacts=2, Number of Positions=2, Number of Rows=1, Orientation=Straight, Package Reference=5-146280-2, Packaging=Carton, Panel Mount Retention=No(Without), PCB Mounting Orientation=Vertical, PCB Mount Retention=Without, PCB Thickness=0.063inch, Pitch=2.54mm, Radiation Hardening=No, RoHSCompliant=true, Row Spacing=2.54mm, Selectively Loaded=No(Without), Stabilizers=No(Without), Termination=ThroughHole, Termination Post Length=0.12inch
Q1 Q2 Q3 Q4: library part CMP-1091-00308-1, "N-Channel OptiMOS 3 Power-Transistor, 100 V VDS, 40 A ID, -55 to 150 degC, PG-TSDSON-8-1, Reel, Green", Manufacturer=Infineon, ComponentLink1Description="Manufacturer URL", ComponentLink1URL=http://www.infineon.com/, ComponentLink2Description=Datasheet, ComponentLink2URL=http://www.infineon.com/dgdl/BSZ160N10N3SG_rev1.2.pdf?folderId=db3a304313b8b5a60113cee8763b02d7&fileId=db3a304320896aa20120c3365eef2370, ComponentLink3Description="Package Specification", ComponentLink3URL=http://www.infineon.com/dgdl/BSZ240N12NS3+Rev2.0.pdf?folderId=db3a304313b8b5a60113cee8763b02d7&fileId=db3a30432a40a650012a42f3057a0038, DatasheetVersion="Rev. 1.2", Green=TRUE, Halogen-free=TRUE, ID (max)="40 A", IDpuls (max)="160 A", Mounting Technology="Surface Mount", PackageDescription="8-Pin Plastic (Green) Thin Dual Small Outline Non-Leaded Package, 3.3 x 3.3 mm Body, 0.65 mm Pitch", PackageReference=PG-TSDSON-8-1, PackageVersion="Rev. 02, 09/2008", Packing=Reel, PartNumber="BSZ160N10NS3 G", Polarity=N, Ptot (max)="63 W", QG="19 nC", RDS (on) (max)="16 mOhm", Rth="2.1 K/W", RthJA (max)="62 K/W", RthJC (max)="2.1 K/W", VDS (max)="100 V", VGS(th) (max)="3.5 V", VGS(th) (min)="2 V"
R1 R3 R8 R10: library part CMP-2000-00076-1, "ERA3AEB4990V", Manufacturer=Panasonic, Part Number=ERA3AEB4990V
R2 R5 R6 R9: library part CMP-2000-03327-1, "CRCW06033R30FNEA", Manufacturer="Vishay Dale", Part Number=CRCW06033R30FNEA
R4: library part CMP-2000-00536-1, "ERJ-3EKF4992V", Manufacturer=Panasonic, Part Number=ERJ-3EKF4992V
R7 R12 R13: library part CMP-2000-07452-1, "ERJ3EKF1002V - Chip Resistor, 10 KOhm, +/- 1%, 0.1 W, -55 to 155 degC, 0603 (1608 Metric), RoHS, Tape and Reel", Case\/Package=0603, Case Code (Metric)=1608, Manufacturer=Panasonic, Max Operating Temperature=155degC, Max Power Dissipation=100mW, Min Operating Temperature=-55degC, Package Description="2-Pin Surface Mount Device, Body 1.6 x 0.85 mm", Package Quantity=1, Package Reference=603, Resistance=10KOhm, Temperature Coefficient=100ppm\/degreesC, Tolerance=1%, Voltage Rating=75V, Case Code (Imperial)=0603, Composition=ThickFilm, Contact Plating=Tin, Datasheet URL=https://industrial.panasonic.com/cdbs/www-data/pdf/RDA0000/AOA0000C304.pdf, Datasheet Version=02/2017, Depth=0.8mm, Height=0.45mm, Lead Free=LeadFree, Length=1.6mm, Manufacturer URL=http://www.panasonic.com/, Military Standard=Not, Mount=SurfaceMount, Mounting Technology=SurfaceMount, Number of Pins=2, Number of Terminations=2, Packaging=TapeandReel, Power Rating=100mW, Radiation Hardening=No, REACH SVHC=NoSVHC, RoHSCompliant=true, Termination=SMD/SMT, Voltage Rating (DC)=75V, Width=0.031inch
R11: library part CMP-2000-00284-1, "ERJ-3EKF1693V", Manufacturer=Panasonic, Part Number=ERJ-3EKF1693V
R14: library part CMP-2000-03118-1, "CRCW060324K0FKEA", Manufacturer="Vishay Dale", Part Number=CRCW060324K0FKEA
R15 R16 R20: library part CMP-2003-00786-1, "ERJ8CWFR010V", Manufacturer=Panasonic, Part Number=ERJ8CWFR010V
R17 R22: library part CMP-2000-00875-1, "ERA3AEB104V", Manufacturer=Panasonic, Part Number=ERA3AEB104V
R18 R23: library part CMP-2000-04454-1, "RT0603BRD073KL", Manufacturer=Yageo, Part Number=RT0603BRD073KL
R19 R21: library part CMP-2000-03849-1, "CRCW060310R0JNEA", Manufacturer="Vishay Dale", Part Number=CRCW060310R0JNEA
R24_1 R24_2: library part CMP-2000-03773-1, "TNPW060349K9BEEN", Manufacturer="Vishay Dale", Part Number=TNPW060349K9BEEN
R25_1 R25_2: library part CMP-2000-03736-1, "TNPW0603249KBEEA", Manufacturer="Vishay Dale", Part Number=TNPW0603249KBEEA
TP1 TP2 TP3 TP4: library part CMP-1672-00005-4, "Test Point, Orange, Through Hole, RoHS, Bulk", Colour=Orange, Manufacturer=Keystone, Package Quantity=100, ComponentLink1Description="Manufacturer URL", ComponentLink1URL=http://www.keyelco.com/, ComponentLink2Description=Datasheet, ComponentLink2URL=http://www.keyelco.com/product-pdf.cfm?p=1322, Contact Material=Bronze, Contact Plating=Silver, DatasheetVersion="Rev. F, 12/2013", Height="8.12 mm", Mount="Through Hole", Mounting Technology="Through Hole", PackageDescription="1-Pin Through Hole Device, Dia 3.17 mm", PackageReference=5013, Packaging=Bulk, REACH SVHC="No SVHC", RoHSCompliant=True
TP5 TP6 TP7 TP12 TP13 TP14 TP15 TP16 "TP17_PWM Generator1" "TP17_PWM Generator2" "TP18_PWM Generator1" "TP18_PWM Generator2" V_IN: library part CMP-1672-00004-4, "Test Point, White, Through Hole, RoHS, Bulk", Colour=White, Manufacturer=Keystone, Package Quantity=100, ComponentLink1Description="Manufacturer URL", ComponentLink1URL=http://www.keyelco.com/, ComponentLink2Description=Datasheet, ComponentLink2URL=http://www.keyelco.com/product-pdf.cfm?p=1321, Contact Material=Bronze, Contact Plating=Silver, DatasheetVersion="Rev. F, 12/2013", Height="8.12 mm", Length="11.3 mm", Mount="Through Hole", Mounting Technology="Through Hole", PackageDescription="1-Pin Through Hole Device, Dia 3.17 mm", PackageReference=5012, Packaging=Bulk, Pins=1, REACH SVHC="No SVHC", RoHSCompliant=true
U1: library part CMP-0058-01418-2, "Photovoltaic Full Bridge Driver, 28-pin Wide SOIC, 26 Rail", Manufacturer="Texas Instruments", PackageTopMarking=NSUZXYTTE#*S72295, PowerWise=N, ComponentLink1Description="Datasheet URL", ComponentLink1URL=http://www.ti.com/general/docs/lit/getliterature.tsp?genericPartNumber=SM72295&fileType=pdf, CompType="Interface IC", High-Reliability=Y, PackageDescription="Molded Package, S.O., .300in Wide, 28 Lead", PackageReference=DW0028A, PartNumber=SM72295MA/NOPB, PinCount=28, RoHS=Y
U2: library part CMP-0859-00002-1, "Triple Inverter Gate, 1.65 to 5.5 V, -40 to 125 degC, 8-Pin DCT, Green (RoHS & no Sb/Br), Tape and Reel", F @ Nom Voltage (Max)="150 MHz", ICC @ Nom Voltage (Max)="0.01 mA", Manufacturer="Texas Instruments", Operating Temperature Range="-40 to 125 degC", tpd @ Nom Voltage (Max)="4.1 ns", Bits=3, ComponentLink1Description="Manufacturer URL", ComponentLink1URL=http://www.ti.com/, ComponentLink2Description=Datasheet, ComponentLink2URL=http://www.ti.com/lit/ds/symlink/sn74lvc3g04.pdf, DatasheetVersion=SCES363L, Mounting Technology="Surface Mount", PackageDescription="8-Pin Plastic Small Outline, Body 2.95 x 2.8 mm, Pitch 0.65 mm", PackageReference=DCT-8, Packing="Tape and Reel", PartNumber=SN74LVC3G04DCTR, RoHS=TRUE, VCC (Max)="5.5 V", VCC (Min)="1.65 V"
U3: library part MIC5233YM5-TR_1, "IC REG LDO ADJ .1A SOT23-5", Case/Package=SOT-23, Dropout Voltage=270mV, Manufacturer 1="Microchip Micrel", Max Input Voltage=36V, Max Operating Temperature=125°C, Max Output Current=100mA, Max Output Voltage=20V, Min Input Voltage=2.3V, Min Operating Temperature=-40°C, Min Output Voltage=1.24V, Output Voltage Accuracy=1%, Package Quantity=1, Supplier Part Number 1=576-1507-1-ND, ComponentLink1Description=https://datasheet.ciiva.com/2044/mic5233-2044736.pdf?src-supplier=Digi-Key, ComponentLink1URL=https://datasheet.ciiva.com/2044/mic5233-2044736.pdf?src-supplier=Digi-Key, ComponentLink2Description=https://datasheet.ciiva.com/16374/mic5233-16374581.pdf?src-supplier=Future+Electronics, ComponentLink2URL=https://datasheet.ciiva.com/16374/mic5233-16374581.pdf?src-supplier=Future+Electronics, ComponentLink3Description=https://datasheet.ciiva.com/23773/1670787-23773077.pdf?src-supplier=Newark, ComponentLink3URL=https://datasheet.ciiva.com/23773/1670787-23773077.pdf?src-supplier=Newark, ComponentLink4Description=https://datasheet.ciiva.com/13026/mic5233-13026150.pdf?src-supplier=Mouser, ComponentLink4URL=https://datasheet.ciiva.com/13026/mic5233-13026150.pdf?src-supplier=Mouser, ComponentLink5Description=https://datasheet.ciiva.com/26890/getdatasheetpartid-111208-26890058.pdf?src-supplier=Verical, ComponentLink5URL=https://datasheet.ciiva.com/26890/getdatasheetpartid-111208-26890058.pdf?src-supplier=Verical, ComponentLink6Description=https://datasheet.ciiva.com/2044/mic5233-2044734.pdf?src-supplier=Digi-Key, ComponentLink6URL=https://datasheet.ciiva.com/2044/mic5233-2044734.pdf?src-supplier=Digi-Key, ComponentLink7Description=https://datasheet.ciiva.com/7993/1670787-7993422.pdf?src-supplier=Element14, ComponentLink7URL=https://datasheet.ciiva.com/7993/1670787-7993422.pdf?src-supplier=Element14, ComponentLink8Description=https://datasheet.ciiva.com/2044/mic5233-2044735.pdf?src-supplier=Digi-Key, ComponentLink8URL=https://datasheet.ciiva.com/2044/mic5233-2044735.pdf?src-supplier=Digi-Key, ComponentLink9Description=https://datasheet.ciiva.com/23772/1670787-23772959.pdf?src-supplier=Newark, ComponentLink9URL=https://datasheet.ciiva.com/23772/1670787-23772959.pdf?src-supplier=Newark, Manufacturer Part Number 1=MIC5233YM5-TR, Mount="Surface Mount", Number of Outputs=1, Number of Pins=5, Number of Regulators=1, Output Current=100mA, Output Type=Adjustable, Output Voltage=20V, Packaging="Tape and Reel", Polarity=Positive, Pricing 1="1=1.20000, 25=1.00000, 100=0.91000 (USD)", Radiation Hardening=No, REACH SVHC="No SVHC", RoHS=Yes, Stock 1=13352, Supplier 1=Digi-Key
U4: library part CMP-2000-06456-1, "Voltage Output, High / Low-Side Measurement, Bi-Directional Zero-Drift Series, Current Shunt Monitor, 2.7 to 26 V, -40 to 125 degC, 6-Pin SOT-23 (DCK6), Green (RoHS & no Sb/Br), Tape and Reel", Manufacturer=TexasInstruments, Maximum Operating Temperature=+125C, Minimum Operating Temperature=-40C, Operating Supply Current=115uA, Package / Case=SOT-23-6, Package Description="6-Pin Plastic Small Outline, Body 2 x 1.25 mm, Pitch 0.65 mm", Package Reference=DCK6, Package Version="4093553-4/G, 01/2007", Supply Voltage - Max=26V, Supply Voltage - Min=2.7V, Vcm - Common Mode Voltage=-0.3Vto+26V, Vos - Input Offset Voltage=60uV, Accuracy=1%, Amplifier Type=CurrentSense, Brand=TexasInstruments, CMRR - Common Mode Rejection Ratio=105dB, Datasheet URL=http://www.ti.com/lit/gpn/INA214?keyMatch=INA214AIDCKT&tisearch=Search-EN-Everything, Datasheet Version="Rev. G, 07/2014", Development Kit=INA210-214EVM, Gain Error=0.02%, Gain V/V=100V/V, GBP - Gain Bandwidth Product=30kHz, Manufacturer URL=http://www.ti.com/, Mounting Style=SMD/SMT, Mounting Technology=SurfaceMount, Number of Channels=1Channel, Packaging=Reel, Product=CurrentSenseAmplifiers, Product Category=CurrentSenseAmplifiers, RoHS=True, Series=INA214, Topology=CurrentShuntFeedback, Unit Weight=0.000088oz
U5_1 U5_2: "Oscillator, Silicon IC 3.81Hz ~ 1MHz TSOT-23-6", Case/Package=SOT-23-6, Frequency=3.81Hz, Manufacturer 1="Analog Devices", Manufacturer Part Number 1=LTC6992IS6-1#TRMPBF, Max Operating Temperature=85°C, Min Operating Temperature=-40°C, Operating Supply Current=365uA, Package Quantity=500, Supplier Part Number 1=LTC6992IS6-1#TRMPBFCT-ND, ComponentLink1Description=https://datasheet.ciiva.com/15116/getdatasheetpartid-411031-15116193.pdf?src-supplier=Verical, ComponentLink1URL=https://datasheet.ciiva.com/15116/getdatasheetpartid-411031-15116193.pdf?src-supplier=Verical, ComponentLink2Description=https://datasheet.ciiva.com/6668/29337-6668309.pdf?src-supplier=Digi-Key, ComponentLink2URL=https://datasheet.ciiva.com/6668/29337-6668309.pdf?src-supplier=Digi-Key, ComponentLink3Description=https://datasheet.ciiva.com/6668/29337-6668312.pdf?src-supplier=Digi-Key, ComponentLink3URL=https://datasheet.ciiva.com/6668/29337-6668312.pdf?src-supplier=Digi-Key, ComponentLink4Description=https://datasheet.ciiva.com/6668/29337-6668316.pdf?src-supplier=Digi-Key, ComponentLink4URL=https://datasheet.ciiva.com/6668/29337-6668316.pdf?src-supplier=Digi-Key, ComponentLink5Description=http://datasheet.octopart.com/LTC6992IS6-1%23TRMPBF-Linear-Technology-datasheet-10978009.pdf?src-supplier=Linear+Technology, ComponentLink5URL=http://datasheet.octopart.com/LTC6992IS6-1%23TRMPBF-Linear-Technology-datasheet-10978009.pdf?src-supplier=Linear+Technology, ComponentLink6Description=http://sigma.octopart.com/57691988/technical_drawing/Linear-Technology-LTC6992IS6-1%23TRMPBF.pdf?src-supplier=Linear+Technology, ComponentLink6URL=http://sigma.octopart.com/57691988/technical_drawing/Linear-Technology-LTC6992IS6-1%23TRMPBF.pdf?src-supplier=Linear+Technology, Depth=1.75mm, Lead Free="Lead Free", Length=2.9mm, Mount="Surface Mount", Number of Pins=23, Packaging="Tape and Reel", Pricing 1="1=4.57000, 25=3.03440, 100=2.50910, 250=2.38364 (USD)", Radiation Hardening=No, Stock 1=9940, Supplier 1=Digi-Key
U6: library part CMP-0004-00179-1, "Enhanced Product 12-Bit, 1 us Serial Input Dual DAC, Programmable Internal Reference, Settling Time, -55 to 125 degC, 8-pin SOIC (D8), Green (RoHS & no Sb/Br)", Manufacturer="Texas Instruments", Power Consumption(Typ)(mW)=4.5, Code_JEDEC=MS-012, ComponentLink1Description="Manufacturer URL", ComponentLink1URL=http://www.ti.com/, ComponentLink2Description=Datasheet, ComponentLink2URL=http://www.ti.com/general/docs/lit/getliterature.tsp?genericPartNumber=TLV5638-EP&fileType=pdf, ComponentLink3Description="Package Specification", ComponentLink3URL=http://www.ti.com/litv/pdf/msoi002j, DAC Channels=2, DatasheetVersion=SGLS130B, DNL(Max)(+/-LSB)=1, Eco-Plan="Green (RoHS & no Sb/Br)", INL(Max)(+/-LSB)=6, Interface="Serial SPI", Mounting Technology="Surface Mount", PackageDescription="8-Pin Plastic Small Outline, Body 4.9 x 3.9 mm, Pitch 1.27 mm", PackageReference=D8, PackageVersion="4040047-3/M, 06/2011", PartNumber=TLV5638MDREP, Resolution(Bits)=12, Settling Time(us)=1, SFDR(dB)=72, SNR(dB)=74, SubFamily="Precision DAC (=<10MSPS)"
Vin+ Vin- Vout+ Vout-: library part CMP-2000-05183-1, "Test Point, White, SMT", Manufacturer=Keystone, Contact Plating=Silver, Datasheet URL=https://datasheet.ciiva.com/1123/5015-1123862.pdf, Datasheet Version=Mar-14, Finish Plating=SilverPlate, Height=0.06In., Length="0.105\"(2.667mm)", Manufacturer URL=http://www.keyelco.com/, Material=PhosphorBronze, Material, Contact=PhosphorBronze, Mounting=SurfaceMount, Mounting Type=SurfaceMount, Primary Type=PCBTestPoints, Style=Miniature, Termination=SMT, Thickness=0.010In., Type=TestPointsonTapeandReel

## Free pads (board coordinates)
  round 125.98 hole 125.98: 0(550,100) 0(600,2000) 0(2600,300) 0(2600,1400)

## Via types
v1: diameter 23.62, hole 11.81, L1 to L4, tented both sides, 78 vias
v2: diameter 50, hole 28, L1 to L4, tented both sides, 1 vias

## Nets (pads, with @x,y where several pads share a name; then routed paths per layer and width w, separated by ;. In a path a pad name is that pad's centre, name@x,y a point inside that pad or via, vN(x,y) a via of type N, cw(c..) or ccw(c..) an arc to the next point about the centre after c; other vN are vias at no path point)
+3V3: C10.1 C26_1.2 C26_2.2 C27.1 POWER.5 R12.2 R13.2 U1.17 U2.8 U4.3 U5_1.4 U5_1.5 U5_2.4 U5_2.5 U6.8 | length 992
  L1 w11.81: v1(1299.21,842.52) 1299.21,845.47 1373.03,919.29 C27.1 ; U6.8@1373.03,973.23 U6.8 ; v1(1669.29,1196.85) 1692.91,1196.85 1716.54,1220.47 U5_2.5 ; C26_1.2 1773.62,839.57 1786.42,852.36 v1(1786.42,884.84) v1@1791.34,889.76 ; U4.3 2546.26,490.16 C10.1 2550.2,492.13 v1(2602.36,492.13)
  L1 w19.68: C27.1 U6.8@1373.03,973.23 ; C26_2.2@1600.46,1283.46 C26_2.2 ; C26_2.2@1609.31,1262.8 1626.05,1246.06 U5_2.4 U5_2.5 ; U5_1.5 U5_1.4 1754.86,860.24 C26_1.2@1771.59,843.5
  L4 w11.81: v1(1429.13,830.71) 1429.72,830.12 U1.17 ; R13.2 1439.22,665.11 1439.22,638.78 1448.82,629.18 v1(1448.82,625.98) ; R12.2 2049.21,889.76 v1(2051.18,889.76) ; U2.8 2106.3,1105.31 2106.3,1137.8 2125.98,1157.48 v1(2192.91,1157.48)
+5V: POWER.4
+10V: C5.1 C6.1 C8.2 C9.2 R11.2 U1.21 U1.25 U3.5 | length 2157.1
  L1 w11.81: U3.5 U3.5@833.66,257.81
  L1 w19.68: U3.5 831.69,250.92 860.17,279.4 888.78,279.4 C8.2 890.75,279.4 949.8,279.4 C9.2 957.12,272.08 1054.69,272.08 v2(1055.12,271.65) 1055.12,263.78 1003.94,212.6 1003.94,161.42 959.65,117.13 R11.2
  L4 w19.68: v2(1055.12,271.65) 1185.04,271.65 1413.39,500 1574.8,500 1645.08,570.28 1645.08,726.36 1603.72,767.72 1602.36,767.72 1602.36,967.13 ; C6.1 1438.98,1027.85 1439.96,1028.84 1512.5,1028.84 U1.21 1539.37,1030.12 1602.36,967.13 ; C5.1 1442.91,1232.18 1443.9,1231.2 1512.7,1231.2 U1.25 1539.37,1230.12 1602.36,1167.13 1602.36,967.13
+supply: C19.2 C20.2 C21.2 C22.1 C23.2 C24.2 C25.2 R4.2 R8.1 R16.2 R17.2 Self-Mode.2 Vout+.1 | length 3575.4
  L1 w8: C23.2@122.44,1673.23 C23.2
  L1 w15: Vout+.1 Vout+.1@130.31,1912.99 ; C23.2@122.44,1673.23 C22.1 C22.1@123.8,1631.28 ; C19.2@187.2,1395.47 187.2,1257.68 v1(236.22,1208.66) ; C21.2@188.98,1585.63 C21.2@188.98,1586.61 ; R17.2 432.09,1773.62 R16.2 446.85,1762.8 521.65,1762.8 R8.1 ; v1(1322.83,748.03) 1397.64,673.23 1397.64,568.65 1559.06,407.24 v1(1559.06,381.89) 1749.21,381.89 Self-Mode.2
  L4 w15: v1(236.22,1208.66) 236.22,488.19 519.68,204.72 1153.77,204.72 1330.94,381.89 v1(1559.06,381.89) ; R4.2 1195.87,749.02 1216.54,728.35 1303.15,728.35 v1(1322.83,748.03)
CS_N: C18.2 R21.1 U4.5 | length 2594.2
  L1 w15: R21.1 1067.91,1119.71 1076.7,1110.93 1115.07,1110.93 1115.07,1126.59 1116.42,1127.95 C18.2 1129.92,1127.95 1131.28,1126.59 1131.28,1119.71 1140.07,1110.93 1152.49,1110.93 1174.51,1132.94 1174.51,1171.95 v1(1141.73,1204.72) ; v1(2350.39,440.94) 2358.27,440.94 2381.89,464.57 U4.5
  L3 w15: v1(1141.73,1204.72) 1141.73,1194.19 1174.51,1161.42 1174.51,424 1375.47,223.03 2156.02,223.03 2249.41,316.42 2249.41,456.69 2261.22,468.5 2310.66,468.5 2338.22,440.94 v1(2350.39,440.94)
CS_P: C18.1 R19.1 U4.4 | length 2587.7
  L1 w15: R19.1 1067.91,1077.14 1076.7,1085.93 1104.03,1085.93 1112.82,1077.14 1112.82,1070.26 1114.17,1068.9 C18.1 1129.92,1068.9 1131.28,1070.26 1131.28,1077.14 1140.07,1085.93 1162.85,1085.93 1199.51,1122.58 1199.51,1171.95 v1(1232.28,1204.72) ; v1(2350.39,515.75) 2354.33,515.75 2379.92,490.16 U4.4
  L3 w15: v1(1232.28,1204.72) 1232.28,1194.19 1199.51,1161.42 1199.51,434.35 1385.83,248.03 2145.67,248.03 2224.41,326.77 2224.41,467.05 2250.87,493.5 2295.28,493.5 2308.91,507.14 2341.78,507.14 v1(2350.39,515.75)
GND: C5.2 C6.2 C7.2 C8.1 C9.1 C10.2 C11.1 C12.1 C13.1 C14.2 C15.1 C16.1 C17.1 C19.1 C20.1 C21.1 C22.2 C23.1 C24.1 C25.1 C26_1.1 C26_2.1 C27.2 ICSP.6 IOH1.7 POWER.2 POWER.3 R7.1 R14.2 R18.1 R20.1 R21.2 R23.1 R24_1.1 R24_2.1 R25_1.1 R25_2.1 U1.5 U1.23 U2.4 U3.2 U4.1 U4.2 U5_1.2 U5_2.2 U6.5 Vin-.1 Vout-.1 | length 1360
  L1 w11.81: R23.1@566.93,210.63 R23.1 571.64,219.28 601.17,219.28 v1(622.05,240.16) ; R18.1 v1(668.31,1841.54) v1@669.29,1842.52 ; C7.2 673.23,226.38 v1(673.23,255.91) ; U3.2@726.32,219.49 U3.2 739.17,220.41 759.78,220.41 775.59,236.22 v1(775.59,255.91) ; v1(736.22,114.17) R14.2 ; v1(889.76,169.29) C8.1 ; C9.1@944.88,203.61 C9.1 v1(956.69,169.29) ; R20.1 1015.75,1154.53 R21.2 1018.7,1264.76 v1(988.19,1295.28)
  L1 w19.68: v1(244.09,149.61) Vin-.1 ; v1(244.09,1921.26) Vout-.1 ; v1(338.58,90.55) Vin-.1 ; v1(338.58,212.6) Vin-.1 ; v1(338.58,1858.27) Vout-.1 ; v1(338.58,1980.32) Vout-.1 ; v1(437.01,149.61) Vin-.1 ; v1(437.01,1921.26) Vout-.1
  L4 w11.81: U2.4 2261.81,1028.54 2316.93,973.43 2316.93,974.41 2295.28,996.06
  other v1: 59.84,785.75 122.83,785.75 91.34,848.74 154.33,848.74 59.84,911.73 122.83,911.73 2318.9,972.44 91.34,974.72 154.33,974.72 59.84,1037.72 122.83,1037.72 91.34,1100.71 154.33,1100.71
HIA: "TP18_PWM Generator2.1" U1.7 U2.1 U5_2.6 | length 977.8
  L1 w11.81: U5_2.6 1759.25,1240.75 1759.25,1102.95 v1(1775.59,1086.61) ; v1@1972.44,1078.74 1978.35,1084.65 2312.99,1084.65 v1(2318.9,1090.55) 2318.9,1192.91 2271.65,1240.16
  L4 w11.81: v1(1775.59,1086.61) 1778.84,1083.37 1884.55,1083.37 U1.7 v1(1971.06,1080.12) v1@1972.44,1078.74 ; U2.1 2304.13,1105.31 v1(2318.9,1090.55)
HIB: "TP18_PWM Generator1.1" U1.8 U2.3 U5_1.6 | length 1474.1
  L1 w11.81: U5_1.6 1626.97,899.1 1660.94,933.07 v1(1779.53,933.07) ; v1(2015.75,1015.75) 2129.92,1015.75 2149.61,1035.43 2356.79,1035.43 2397.64,1076.28 v1(2397.64,1086.61) 2397.64,1263.78 2271.65,1389.76
  L4 w11.81: v1(1779.53,933.07) 1779.53,978.24 1831.41,1030.12 U1.8 1958.07,1030.12 1972.44,1015.75 v1(2015.75,1015.75) ; U2.3 2284.45,1054.13 2299.21,1039.37 2350.39,1039.37 v1(2397.64,1086.61)
LIA: TP6.1 U1.6 U2.7 | length 385.8
  L4 w11.81: U1.6 2020.67,1130.12 ; U2.7 2071.06,1079.72 2020.67,1130.12 ; TP6.1 2118.11,1227.56 2020.67,1130.12
LIB: TP5.1 U1.9 U2.5 | length 339.7
  L4 w11.81: U1.9 1894.88,973.03 2046.85,973.03 ; U2.5 2046.85,973.03 ; TP5.1 2050.59,973.03 2046.85,973.03
MISO: IOH1.5 P1.1 | length 2571.7
  L2 w11.81: IOH1.5 1245.57,1994.43 1245.57,1978.84 1291.34,1933.07 1889.76,1933.07 2421.26,1401.57 2421.26,1003.94 2632.9,792.29 2632.9,676.21 2602.36,645.67 2486.61,645.67 P1.1
MOSI: IOH1.4 P1.2 U6.1 | length 2157.7
  L1 w11.81: IOH1.4 1443.98,1896.02 1443.98,1081.42 1541.34,984.05 U6.1 v1(1692.72,984.05)
  L2 w11.81: v1(1692.72,984.05) 1700.02,976.75 1700.02,918.09 1799.21,818.9 2413.39,818.9 P1.2
NetAD_1: AD.1 TP3.1 U1.3 | length 1641.3
  L4 w11.81: AD.1 2000,531.5 1748.03,783.46 1748.03,1165.94 1862.2,1280.12 U1.3 1988.78,1280.12 TP3.1
NetAD_2: AD.2 TP4.1 U1.12 | length 951.8
  L4 w11.81: U1.12 1913.39,830.12 1943.7,799.8 1998.33,799.8 2055.59,742.54 2055.59,664.88 TP4.1 2204.72,515.75 2204.72,393.7 2100,288.98 AD.2
NetAD_3: AD.3 R17.1 R18.2 TP14.1 | length 3769.1
  L1 w11.81: R17.1 489.17,1841.54 R18.2 564.96,1872.05 598.43,1905.51 865.06,1905.51 1006.8,1763.78 TP14.1
  L4 w11.81: TP14.1 2240.16,1763.78 2444.88,1559.06 2444.88,885.83 2401.57,842.52 2295.28,842.52 2244.09,791.34 2244.09,144.09 AD.3
NetAD_4: AD.4 TP7.1 U4.6 | length 745.3